# Altium PCB Heater.PcbDoc
Units mil, origin at the board's own origin, x right, y up, seen from the top; angles counter-clockwise.
Board outline 5118.11 x 2165.35 mil, 2 copper layers (Top Layer, Bottom Layer); 91 components, 63 nets, 311 pads, 49 vias.
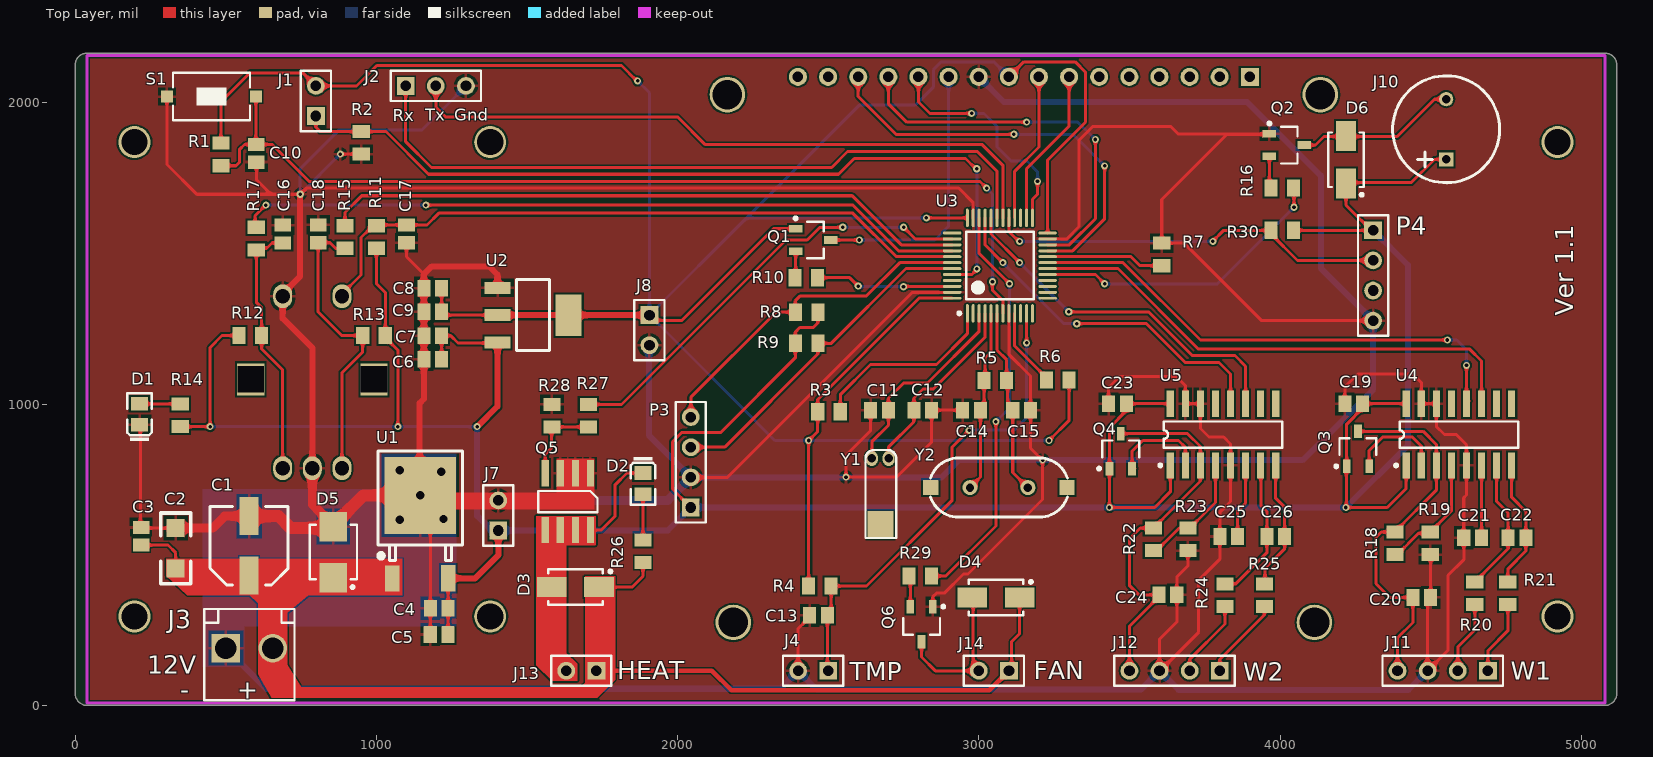
[diagram p0: Top Layer view]
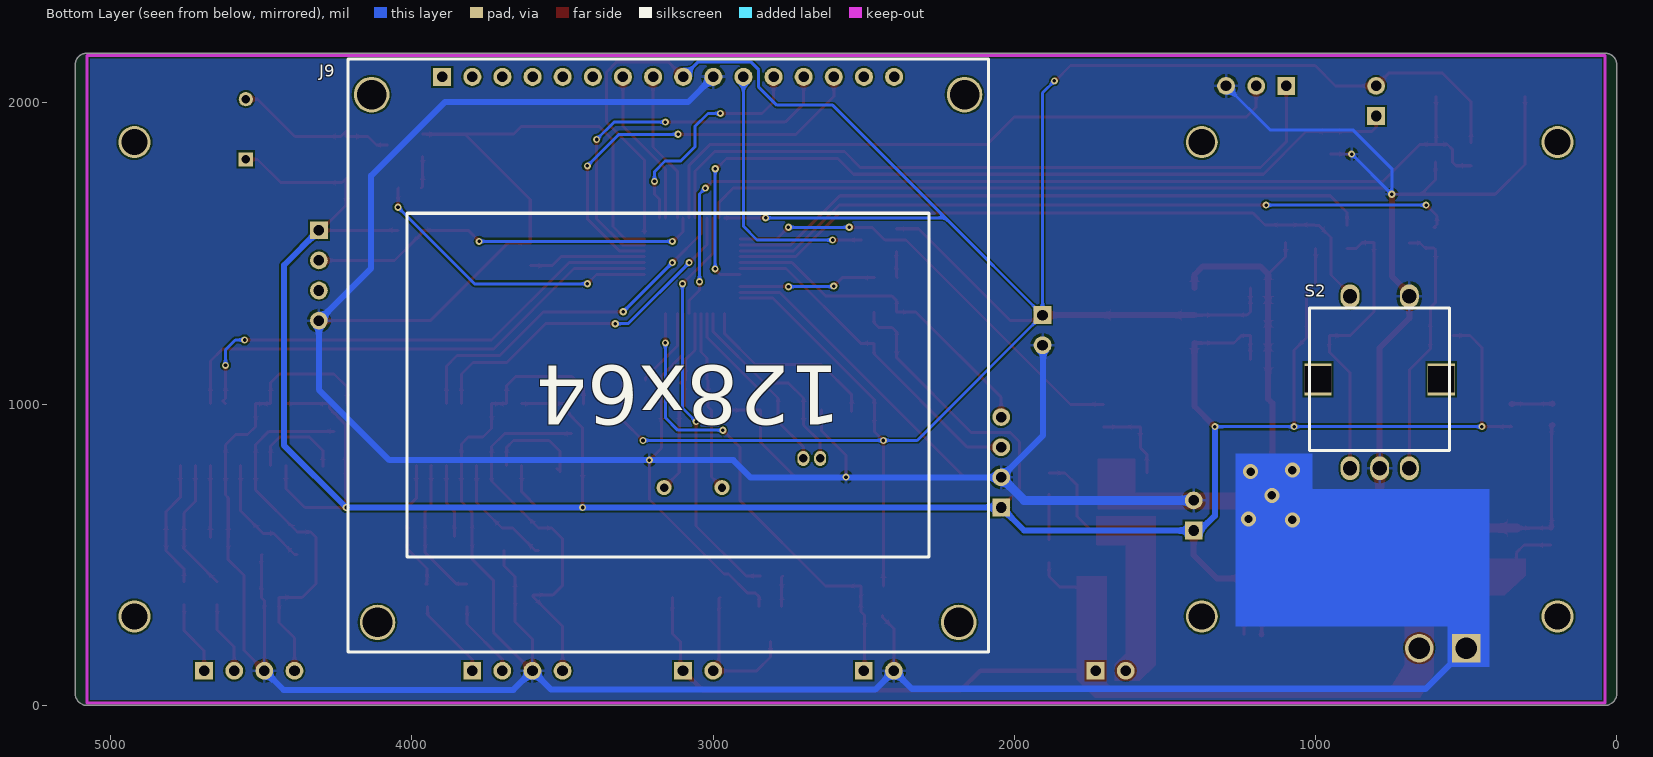
[diagram p1: Bottom Layer view, seen from below]

## Layer stack, top to bottom
Top Solder: solder mask 0.4, Solder Resist, Dk 3.5
Top Layer: signal copper 1.4
Dielectric 1: dielectric 12.6, FR-4, Dk 4.8
Bottom Layer: signal copper 1.4
Bottom Solder: solder mask 0.4, Solder Resist, Dk 3.5

## Board outline
5118.11,39.37 5118.11,2125.98 ccw(c5078.74,2125.98) 5078.74,2165.35 39.37,2165.35 ccw(c39.37,2125.98) 0,2125.98 0,39.37 ccw(c39.37,39.37) 39.37,0 5078.74,0 ccw(c5078.74,39.37)
cut-out: 7323.11,-1321.57

## Design rules (kind name [scope] priority, off if disabled: settings)
Clearance [All] p1: gap=6 ignorepadtopadclearanceinfootprint=FALSE
HoleSize [All] p1: absolutevalues=TRUE maxlimit=248.03 minlimit=11.81 maxpercent=80.000 minpercent=20.000
MinimumSolderMaskSliver [All] p1: minsoldermaskwidth=5
PolygonConnect [All] p1: connectstyle=Relief reliefconductorwidth=10 reliefentries=4 polygonreliefangle="90 Angle" airgapwidth=10
RoutingVias [All] p1: holewidth=28 width=50 viastyle="Through Hole" minholewidth=11.81 minwidth=23.62 maxholewidth=248.03 maxwidth=248.03
SilkToSilkClearance [All] p1: silktosilkclearance=0
SilkToSolderMaskClearance [IsPad] p1: minsilkscreentomaskgap=1 clearancetoexposedcopper=TRUE
SolderMaskExpansion [All] p1: expansion=4
Width [All] p1: maxlimit=100 minlimit=5 preferedwidth=10
26 further rules are at their usual default settings.

## Classes and differential pairs
component class 3Dheater3: D2 D3 D4 J13 J14 Q5 Q6 R26 R27 R28 R29
component class 3Dheater2: C19 C20 C21 C22 C23 C24 C25 C26 J11 J12 Q3 Q4 R18 R19 R20 R21 R22 R23 R24 R25 U4 U5
component class 3Dheater1: C1 C2 C3 C4 C5 C6 C7 C8 C9 C10 C11 C12 C13 C14 C15 C16 C17 C18 D1 D5 D6 J1 J2 J3 J4 J7 J8 J9 J10 P3 P4 Q1 Q2 R1 R2 R3 R4 R5 R6 R7 R8 R9 R10 R11 R12 R13 R14 R15 R16 R17 R30 S1 S2 U1 U2 U3 Y1 Y2

## Components (designator, comment, footprint, x,y, rotation, side; value= is the part's Value field where it differs from the comment)
C1 "100uF/35V" "ELCO Case D" 577.3,529.91 r270 top
C2 "47uF" 1206 334.02,588.84 r270 top
C3 "0.1uF" C0805 219.16,561.74 r270 top
C4 "47uF" C0805 1208.47,322.68 r0 top
C5 "0.1uF" C0805 1208.44,235.41 r0 top
C6 "10uF" C0805 1187.1,1148.88 r0 top
C7 "0.1uF" C0805 1187.1,1227.58 r0 top
C8 "10uF" C0805 1187.1,1384.97 r0 top
C9 "0.1uF" C0805 1187.1,1306.27 r0 top
C10 "0.1uF" C0805 601.45,1832.68 r90 top
C11 "15pF" C0805 2670.47,980 r180 top
C12 "15pF" C0805 2814.11,980.11 r0 top
C13 "0.1uF" C0805 2467.8,299.05 r0 top
C14 "22pF" C0805 2976.05,979.85 r180 top
C15 "22pF" C0805 3142.16,979.85 r0 top
C16 "0.1uF" C0805 689.8,1564.7 r270 top
C17 "0.1uF" C0805 1100,1565.47 r90 top
C18 "0.1uF" C0805 806.93,1565.47 r270 top
C19 "1uF" C0805 4244.4,1001.17 r180 top
C20 "1uF" C0805 4470.62,358.26 r180 top
C21 "1uF" C0805 4639.41,556.66 r180 top
C22 "0.1uF" C0805 4786.57,556.66 r180 top
C23 "1uF" C0805 3460.07,1001.17 r180 top
C24 "1uF" C0805 3627.59,366.93 r180 top
C25 "1uF" C0805 3829.69,560.75 r180 top
C26 "0.1uF" C0805 3985.91,560.75 r180 top
D1 "翠绿 0805" 0805_LED_S1 213.7,966.58 r90 top
D2 "红灯 0805" 0805_LED_S1 1885.07,736.34 r270 top
D3 "S1G" "DO214AC (SMA)" 1660.55,392.63 r0 top
D4 "S1G" "DO214AC (SMA)" 3056.73,358.11 r0 top
D5 "TVS" "DO214AA (SMB)" 857.13,508.77 r270 top
D6 "S1G" "DO214AC (SMA)" 4218.92,1811.52 r270 top
J1 "BOOT" HDR1X2 799.24,1956.6 r90 top
J2 "Debug" HDR1X3 1097.35,2056.6 r0 top
J3 "DC12V" HDR1X2_396 500,190 r0 top locked
J4 "TEMP" HDR1X2 2500,115 r180 top
J7 "Header 2" HDR1X2 1404.91,580.57 r90 top
J8 "Header 2" HDR1X2 1906.57,1295.73 r270 top
J9 "LCD" LCD12864 3149.61,1062.99 r0 bottom locked
J10 "BEEP" BELL-5 4551.41,1812.63 r90 top
J11 "Sensor" HDR1X4 4690,115 r180 top locked
J12 "Sensor" HDR1X4 3800,115 r180 top locked
J13 "HEATER" HDR1X2 1730.32,115 r180 top locked
J14 "FAN" HDR1X2 3100,115 r180 top
P3 "Header 4" HDR1X4 2043.98,657.09 r90 top
P4 "Header 4" HDR1X4 4308.87,1577.34 r270 top
Q1 "S8550" SOT-23-3L 2450,1545 r180 top
Q2 "S8050" SOT-23-3L 4022.67,1860.2 r180 top
Q3 "S8550" SOT-23-3L 4258.53,851.62 r270 top
Q4 "S8550" SOT-23-3L 3471.12,844.09 r270 top
Q5 "IRF8736PBF" "SOIC127P600X175-8N (SO8)" 1635.55,676.29 r270 top
Q6 "S8050" SOT-23-3L 2809.94,269.98 r90 top
R1 "10K" R0805 483.81,1828.96 r90 top
R2 "10K" R0805 950,1867.6 r270 top
R3 "0R" R0805 2502.6,975 r0 top
R4 "100K" R0805 2472.54,396.31 r0 top
R5 "1M" R0805 3054.91,1078.75 r180 top
R6 "0R" R0805 3262.6,1080 r180 top
R7 "10K" R0805 3607.11,1497.02 r90 top
R8 "10K" R0805 2428.31,1305.47 r180 top
R9 "10K" R0805 2428.31,1202.22 r0 top
R10 "2K" R0805 2427.4,1420 r180 top
R11 "10K" R0805 1000,1555 r270 top
R12 "10K" R0805 581.76,1227.97 r180 top
R13 "10K" R0805 992.13,1227.97 r0 top
R14 "560R" R0805 349.1,963.77 r270 top
R15 "10K" R0805 895.84,1555 r270 top
R16 "2K" R0805 4006.92,1717.49 r0 top
R17 "10K" R0805 601.45,1549.94 r270 top
R18 "20K" R0805 4381.18,538.28 r90 top
R19 "8.2K" R0805 4498.53,538.28 r270 top
R20 "1K" R0805 4646.51,371.96 r270 top
R21 "1K" R0805 4756.06,371.96 r270 top
R22 "20K" R0805 3579.55,551.47 r90 top
R23 "8.2K" R0805 3693.95,551.47 r270 top
R24 "1K" R0805 3817.1,366.35 r270 top
R25 "1K" R0805 3948.31,366.35 r270 top
R26 "1K" R0805 1885.07,512.28 r270 top
R27 "100R" R0805 1703.81,961.79 r270 top
R28 "100K" R0805 1582.98,961.79 r90 top
R29 "1.5K" R0805 2806.24,429.64 r0 top
R30 "1K" R0805 4006.92,1577.34 r180 top
S1 "SW-PB" SW-PB2 452.35,2021.44 r180 top
S2 "EC11" EC11 787.4,1082.68 r180 bottom locked
U1 "LM7805CT" TO-252-2-180 1145.41,421.92 r90 top
U2 "AMS1117-3.3V" SOT-223 1520.33,1295.73 r180 top
U3 "STM32F103C" LQFP48_L 3070,1460 r90 top locked
U4 "HX711" SOP16M 4593.94,899.12 r0 top locked
U5 "HX711" SOP16M 3810.65,899.12 r0 top locked
Y1 "32.768K" XTAL32 2700.72,819.88 r270 top
Y2 "8M" XTAL_US 3162.86,723.2 r180 top

## Footprints (in the part's own frame and the unit in brackets; to place one, negate y for a bottom-side part, rotate by r counter-clockwise, add the part's x,y. Pads: shape width x height; smd on the part's side, far side on the other; paste and mask are expansions set on the pad)
0805_LED_S1 [mm]
  rect 1.16x1.47 smd: A(0.89,0) K(-0.89,0)
  silkscreen extent -2.24,-1.04 1.77,1.03, body extent -1.01,-0.62 1.01,0.62, height 1.1
1206 [mil]
  rect 60x60 smd: 1(-0.03,-0.3) 2(134.97,-0.3)
  silkscreen extent -50,-50 185,50
BELL-5 [mm]
  rect 1.2x1.2 hole 0.7: 1(0,0)
  round 1.2 hole 0.7: 2(5.08,0)
  silkscreen extent -1.97,-4.51 7.05,4.51
C0805 [mm] "Chip Capacitor, Body 2.0x1.3mm, IPC High Density"
  rect 1.1x1.4 smd: 1(-0.75,0) 2(0.75,0)
  body extent -1.1,-0.72 1.1,0.72, height 1.4
"DO214AA (SMB)" [mm]
  rect 2.5x2.3 smd: 1(-2.15,0) 2(2.15,0)
  silkscreen extent -2.3,-2 3.07,2, body extent -2.79,-1.97 2.79,1.97, height 2.61
"DO214AC (SMA)" [mm]
  rect 2.5x1.7 smd: 1(-2,0) 2(2,0)
  silkscreen extent -2.3,-1.5 3.08,1.5, body extent -2.74,-1.4 2.74,1.4, height 2.3
EC11 [mm] "旋转编码开关"
  oval 1.6x2 hole 1.2: 1(-2.5,7) 2(2.5,7) 3(-2.5,-7.5) 4(2.5,-7.5) 5(0,-7.5)
  rect 2.3x2.7 hole 2.2 square: ""(-5.2,0) ""(5.2,0)
  silkscreen extent -5.9,-6 5.9,6, body extent -9.65,-5.97 5.97,5.97, height 6.5
"ELCO Case D" [mm]
  rect 3.2x1.6 smd: 1(2.5,0) 2(-2.5,0)
  silkscreen extent -3.3,-3.3 3.3,3.3, body extent -3.5,-3.3 3.5,3.3, height 5.41
HDR1X2 [mm] "Connector; Header; 2 Position"
  rect 1.5x1.5 hole 0.9: 1(0,0)
  round 1.5 hole 0.9: 2(2.54,0)
  silkscreen extent -1.27,-1.27 3.81,1.27
HDR1X2_396 [mm] "Connector; Header; 2 Position"
  rect 2.4x2.4 hole 1.8: 1(0,0)
  round 2.4 hole 1.8: 2(3.96,0)
  silkscreen extent -1.8,-4.4 5.8,3.3
HDR1X3 [mm] "Connector; Header; 3 Position"
  rect 1.5x1.5 hole 0.9: 1(0,0)
  round 1.5 hole 0.9: 2(2.54,0) 3(5.08,0)
  silkscreen extent -1.27,-1.27 6.35,1.27
HDR1X4 [mm] "Connector; Header; 4 Position"
  rect 1.5x1.5 hole 0.9: 1(0,0)
  round 1.5 hole 0.9: 2(2.54,0) 3(5.08,0) 4(7.62,0)
  silkscreen extent -1.27,-1.27 8.89,1.27
LCD12864 [mil]
  rect 60x60 hole 35: 1(750,-1023.62)
  round 60 hole 35: 2(650,-1023.62) 3(550,-1023.62) 4(450,-1023.62) 5(350,-1023.62) 6(250,-1023.62) 7(150,-1023.62) 8(50,-1023.62) 9(-50,-1023.62) 10(-150,-1023.62) 11(-250,-1023.62) 12(-350,-1023.62) 13(-450,-1023.62) 14(-550,-1023.62) 15(-650,-1023.62) 16(-750,-1023.62)
  round 118.11 hole 98.43: ""(-984.25,-964.57) ""(-964.57,787.4) ""(964.57,787.4) ""(984.25,-964.57)
  silkscreen extent -1063,-1083 1063,886
LQFP48_L [mm] "Thin QFP, 48-Leads, Body 7x7mm, Pitch 0.5mm, IPC High Density"
  oval 1.55x0.25 smd: 1(-4.025,2.75) 2(-4.025,2.25) 3(-4.025,1.75) 4(-4.025,1.25) 5(-4.025,0.75) 6(-4.025,0.25) 7(-4.025,-0.25) 8(-4.025,-0.75) 9(-4.025,-1.25) 10(-4.025,-1.75) 11(-4.025,-2.25) 12(-4.025,-2.75) 25(4.025,-2.75) 26(4.025,-2.25) 27(4.025,-1.75) 28(4.025,-1.25) 29(4.025,-0.75) 30(4.025,-0.25) 31(4.025,0.25) 32(4.025,0.75) 33(4.025,1.25) 34(4.025,1.75) 35(4.025,2.25) 36(4.025,2.75)
  oval 0.25x1.55 smd: 13(-2.75,-4.025) 14(-2.25,-4.025) 15(-1.75,-4.025) 16(-1.25,-4.025) 17(-0.75,-4.025) 18(-0.25,-4.025) 19(0.25,-4.025) 20(0.75,-4.025) 21(1.25,-4.025) 22(1.75,-4.025) 23(2.25,-4.025) 24(2.75,-4.025) 37(2.75,4.025) 38(2.25,4.025) 39(1.75,4.025) 40(1.25,4.025) 41(0.75,4.025) 42(0.25,4.025) 43(-0.25,4.025) 44(-0.75,4.025) 45(-1.25,4.025) 46(-1.75,4.025) 47(-2.25,4.025) 48(-2.75,4.025)
  silkscreen extent -4.15,-2.85 2.85,3.55, body extent -3.5,-3.5 3.5,3.5, height 1.6
R0805 [mm]
  rect 1.1x1.45 smd mask+0.203: 1(-0.95,0) 2(0.95,0)
  body extent -1,-0.6 1,0.65, height 0.44
"SOIC127P600X175-8N (SO8)" [mm]
  rect 2.2x0.6 smd: 1(-2.4,1.905) 2(-2.4,0.635) 3(-2.4,-0.635) 4(-2.4,-1.905) 5(2.4,-1.905) 6(2.4,-0.635) 7(2.4,0.635) 8(2.4,1.905)
  silkscreen extent -0.9,-2.5 0.9,2.5, body extent -3,-2.45 3,2.45, height 1.75
SOP16M [mm]
  rect 0.6x2.2 smd: 1(-4.445,-2.6) 2(-3.175,-2.6) 3(-1.905,-2.6) 4(-0.635,-2.6) 5(0.635,-2.6) 6(1.905,-2.6) 7(3.175,-2.6) 8(4.445,-2.6) 9(4.445,2.6) 10(3.175,2.6) 11(1.905,2.6) 12(0.635,2.6) 13(-0.635,2.6) 14(-1.905,2.6) 15(-3.175,2.6) 16(-4.445,2.6)
  silkscreen extent -5.42,-2.72 5,1.1
SOT-23-3L [mm] "http://www.aosmd.com/res/packaging_information/SOT-23-3L.pdf"
  rect 1.15x0.65 smd: 1(1.475,-0.95) 2(1.475,0.95) 3(-1.475,0)
  silkscreen extent -0.9,-1.95 1.6,1.55, body extent -0.9,-1.55 0.9,1.55, height 1.25
SOT-223 [mm]
  rect 2.2x1 smd: 1(3,-2.3) 2(3,0) 3(3,2.3)
  rect 2.2x3.5 smd: 2(-3,0)
  silkscreen extent -1.4,-3 1.4,3, body extent -3.49,-3.24 3.49,3.24, height 1.64
SW-PB2 [mm]
  rect 1x1 smd: 1(-3.753,0.001) 2(3.747,0.001)
  silkscreen extent -3.25,-2 3.25,2
TO-252-2-180 [mm] "180度编带包装"
  rect 2.2x1.2 smd: 1(0,2.361) 3(0.004,-2.361)
  rect 6.5x6 smd: 2(7,0)
  silkscreen extent 1.5,-3.57 10.75,3.57, body extent -0.2,-3.27 9.74,3.27, height 2.44
XTAL32 [mil]
  oval 50x40 hole 28: 1(0,0) 2(0,-56)
  rect 92.13x86 smd: ""(220,-27)
  silkscreen extent -28,-77 264,25
XTAL_US [mil]
  round 50 hole 28: 1(0,0) 2(192.13,0)
  rect 50x50 smd: ""(-130.32,0) ""(322.44,0)
  silkscreen extent -131,-98 323,98

## Part data
C1: "RO ELCO 100uF 20% 35V CASE-D EEEFP PAN", Faber ItemCode=36865800, ID=Library_CAP-0004
C2 C3 C4 C5 C6 C7 C8 C9 C10 C11 C12 C13 C14 C15 C16 C17 C18 C19 C20 C21 C22 C23 C24 C25 C26: library part CAP, "Capacitor"
D1: library part "0805 翠绿", "发光二极管", Package=0805, SuppliersPartNumber=C2297, ComponentLink1Description=供应商链接, ComponentLink1URL=http://www.szlcsc.com/product/details_2670.html, Supplier=LC
D2: library part "0805 红灯", "发光二极管", Package=0805, SuppliersPartNumber=C2295, ComponentLink1Description=供应商链接, ComponentLink1URL=http://www.szlcsc.com/product/details_2668.html, Supplier=LC
D3 D4 D6: library part Library_DIO-0001, "RO DIODE S1G DO-214AC", Faber ItemCode=32284000, ID=Library_DIO-0001, Info="Fast Rectifiers 1A 400V"
D5: "TVS保护", PackageDocument=Sep-1996, Code_JEDEC=DO-214-AB, LatestRevisionDate=17-Jul-2002, LatestRevisionNote="Re-released for DXP Platform.", PackageReference=SMC, Published=8-Jun-2000, Publisher="Altium Limited", Type=SMBJ12CA
J1 J4 J13 J14: library part "Header 2H", "Header, 2-Pin, Right Angle", LatestRevisionDate=17-Jul-2002, LatestRevisionNote="Re-released for DXP Platform.", Publisher="Altium Limited"
J2: library part "Header 3", "接插件", LatestRevisionDate=17-Jul-2002, LatestRevisionNote="Re-released for DXP Platform.", Publisher="Altium Limited"
J3: library part "Header 2", "接插件", LatestRevisionDate=17-Jul-2002, LatestRevisionNote="Re-released for DXP Platform.", Publisher="Altium Limited"
J7 J8: "接插件", LatestRevisionDate=17-Jul-2002, LatestRevisionNote="Re-released for DXP Platform.", Publisher="Altium Limited"
J9: library part "Header 16", "Header, 16-Pin", LatestRevisionDate=17-Jul-2002, LatestRevisionNote="Re-released for DXP Platform.", Publisher="Altium Limited"
J10: "蜂鸣器"
J11 J12: library part "Header 4", "Header, 4-Pin", LatestRevisionDate=17-Jul-2002, LatestRevisionNote="Re-released for DXP Platform.", Publisher="Altium Limited"
P3 P4: "Header, 4-Pin", LatestRevisionDate=17-Jul-2002, LatestRevisionNote="Re-released for DXP Platform.", Publisher="Altium Limited"
Q1 Q3 Q4: "PNP三极管", PackageDocument=Sep-1998, Code_JEDEC=TO-92A, ComponentLink1Description="Manufacturer Link", ComponentLink1URL=http://www.fairchildsemi.com/, ComponentLink2Description=Datasheet, ComponentLink2URL=http://www.fairchildsemi.com/ds/2N%2F2N3906.pdf, DatasheetDocument=1997, LatestRevisionDate=15-Jan-2003, LatestRevisionNote="PCB Footprint 'BCY-W3/D4.7' replaced", PackageReference=TO-92A, Published=8-Jun-2000, Publisher="Altium Limited"
Q2 Q6: "NPN三极管", PackageDocument=Sep-1998, Code_JEDEC=TO-92A, ComponentLink1Description="Manufacturer Link", ComponentLink1URL=http://www.fairchildsemi.com/, ComponentLink2Description=Datasheet, ComponentLink2URL=http://www.fairchildsemi.com/ds/2N%2F2N3904.pdf, DatasheetDocument=1997, LatestRevisionDate=15-Jan-2003, LatestRevisionNote="PCB Footprint 'BCY-W3/D4.7' replaced", PackageReference=TO-92A, Published=8-Jun-2000, Publisher="Altium Limited"
Q5: library part LIBRARY_FET-0002, "IRF8736PBF - MOSFET, N SO-8", Faber ItemCode=36926000, ID=LIBRARY_FET-0002, Info="HEXFET Power MOSFET", Mfg="INTERNATIONAL RECTIFIER", Mfg code=IRF8736PBF
R1 R2 R3 R4 R5 R6 R7 R8 R9 R10 R11 R12 R13 R14 R15 R16 R17 R18 R19 R20 R21 R22 R23 R24 R25 R26 R27 R28 R29 R30: library part Res1, "贴片电阻", LatestRevisionDate=17-Jul-2002, LatestRevisionNote="Re-released for DXP Platform.", PackageReference=AXIAL-0.4, Published=8-Jun-2000, Publisher="Altium Limited"
S1: "微动开关", LatestRevisionDate=17-Jul-2002, LatestRevisionNote="Re-released for DXP Platform.", PackageReference=SPST-2, Published=24-Mar-1999, Publisher="Altium Limited"
S2: "旋转编码器"
U2: library part LM1117
U3: "STM32单片机48引脚"
U4 U5: "AD转换"
Y1 Y2: library part CRYSTAL, "Crystal"

## Free pads (board coordinates)
  round 106.3 hole 86.61: ""(196.85,295.28) ""(196.85,1870.08) ""(1377.95,295.28) ""(1377.95,1870.08) ""(4921.26,295.28) ""(4921.26,1870.08)

## Via types
v1: diameter 23.62, hole 11.81, Top Layer to Bottom Layer, 44 vias
v2: diameter 50, hole 28, Top Layer to Bottom Layer, 5 vias

## Nets (pads, with @x,y where several pads share a name; then routed paths per layer and width w, separated by ;. In a path a pad name is that pad's centre, name@x,y a point inside that pad or via, vN(x,y) a via of type N, cw(c..) or ccw(c..) an arc to the next point about the centre after c; other vN are vias at no path point)
3V3: C8.2 C9.2 J1.2 J8.1 J9.9 Q1.1 R1.2 R3.1 R4.1 R6.1 U2.2 U3.24 U3.36 U3.48 | length 9961.7
  Top Layer w10: R1.2 483.81,2003.53 580.41,2100.14 755.7,2100.14 J1.2 934.11,2056.6 1001.7,2124.2 1813.45,2124.2 1864.64,2073.01 v1(1867.16,2073.01) ; C8.2 C9.2 1227.17,1295.73 U2.2@1402.22,1295.73 ; J8.1@1904.46,1293.61 J8.1 ; J8.1@1904.75,1278.56 2014.86,1278.56 2318.7,1582.4 Q1.1 ; R4.1 v1(2435.14,879.52) 2465.2,909.58 R3.1 2465.2,1015.26 2801.67,1351.73 U3.48 ; v1(2825.93,1618.46) U3.36 ; J9.9 3149.46,2136.47 3320.04,2136.47 3354.16,2102.34 3354.16,1936.01 3228.46,1810.31 U3.24 ; v1(3233.07,879.52) 3300,946.46 R6.1
  Top Layer w20: U2.2@1402.22,1295.73 1593.16,1295.73 J8.1
  Bottom Layer w10: J1.2@796.63,2059.22 J1.2 ; v1(1867.16,2073.01) 1906.57,2033.6 J8.1 ; v1(2825.93,1618.46) 2229.31,1618.46 ; J9.9 3049.75,2136.47 2875.32,2136.47 2848.78,2109.93 2848.78,2052.58 2788.68,1992.47 2603.32,1992.47 2229.31,1618.46 ; v1(3233.07,879.52) v1(2435.14,879.52) 2322.78,879.52 J8.1 ; J8.1 2229.31,1618.46
5V: C4.2 C5.2 C6.2 C7.2 C19.1 C23.1 D6.2 J7.1 J10.1 P3.1 P4.1 Q3.1 Q4.1 R8.1 R9.1 R11.2 R12.2 R13.2 R14.2 R30.1 U1.3 U2.3 U4.1 U4.16 U5.1 U5.16 | length 10773.3
  Top Layer w10: R14.2 350.67,924.8 353.55,927.68 356.84,924.39 357.82,925.38 v1(448.09,925.38) 448.09,1188.32 487.74,1227.97 R12.2 ; R11.2 1000,1400.48 1029.53,1370.95 R13.2 1029.53,1221.08 1071.46,1179.15 v1(1071.46,925.38) ; C6.2 C7.2 1246.6,1227.58 1271.09,1203.09 1402.22,1203.09 U2.3 ; C5.2 1237.96,322.65 C4.2 1238,421.72 U1.3 ; P3.1 1982.92,718.15 1982.92,874.93 2014.74,906.75 2143.81,906.75 2390.91,1153.85 R9.1 2390.91,1239.21 2405.92,1254.22 2450.36,1254.22 2465.72,1269.57 R8.1 ; U5.1 3635.65,709.07 3583.67,657.09 v1(3433.72,657.09) Q4.1 3433.72,922.01 3489.6,977.88 C23.1 3489.91,1001.48 U5.16 ; R30.1@4046.29,1577.34 P4.1@4302.31,1577.34 ; P4.1 P4.1@4302.31,1577.34 ; U4.1 4418.94,720.27 4355.76,657.09 v1(4218.63,657.09) 4219.88,658.34 4219.88,792.3 Q3.1 4221.13,933.82 4273.93,986.61 C19.1 4274.24,1001.48 U4.16 ; J10.1 4512.79,1812.63 4435.89,1735.72 4231.73,1735.72 4218.92,1748.53 D6.2 4218.92,1660.72 P4.1@4302.31,1577.34
  Top Layer w20: U1.3 1327.84,422.09 1404.91,499.16 J7.1 ; v1(1334.67,925.38) 1402.22,992.92 U2.3@1402.22,1203.09
  Bottom Layer w10: v1(448.09,925.38) v1(1071.46,925.38) v1(1334.67,925.38)
  Bottom Layer w20: v1(1334.67,925.38) 1334.67,629.49 1383.6,580.57 J7.1 1967.46,580.57 P3.1 v1(3433.72,657.09) v1(4218.63,657.09) 4424.08,862.53 4424.08,1462.13 P4.1
12V: C1.1 C2.2 C3.2 D3.2 D4.2 D5.2 J3.2 J13.1 J14.1 R26.2 U1.1 | length 2066.2
  Top Layer w10: C3.2@219.27,532.32 C3.2 308.27,532.21 333.72,506.76 C2.2 ; D3.2 1848.77,392.63 1885.07,428.93 R26.2 ; J14.1 3108.97,123.97 3108.97,211.91 3135.47,238.41 D4.2
  Top Layer w15: J13.1 2113.84,115 2178.75,50.09 3035.09,50.09 J14.1
BEEP: R16.2 U3.17 | length 1000.4
  Top Layer w10: U3.17 3387.05,1430.47 v1(3417.86,1399.67) ; R16.2 4046.29,1715.52 v1(4046.29,1653.64)
  Bottom Layer w10: v1(3417.86,1399.67) 3792.32,1399.67 v1(4046.29,1653.64)
BOOT0: J1.1 R2.1 U3.44 | length 2755.5
  Top Layer w10: J1.1 799.24,1919.06 813.3,1905 R2.1 1031.66,1905 1173.33,1763.33 2534.34,1763.33 2586.68,1815.68 2955.82,1815.68 2990.05,1781.45 v1(2993.12,1781.45) ; U3.44 2977.48,1430.47 2993.53,1446.52 v1(2993.53,1448.89)
  Bottom Layer w10: v1(2993.12,1781.45) 2993.32,1781.25 2993.32,1449.09 v1(2993.53,1448.89)
EC_A: R15.1 U3.39 | length 2150.3
  Top Layer w10: R15.1 895.84,1636.49 951.29,1691.94 2579.55,1691.94 2742.59,1528.9 U3.39
EC_B: R17.1 U3.40 | length 2444.9
  Top Layer w10: R17.1 606.22,1587.34 597.35,1596.21 597.35,1625.48 v1(632.95,1661.07) ; v1@1159.79,1656.5 v1(1164.37,1661.07) 2581.61,1661.07 2733.46,1509.21 U3.40
  Bottom Layer w10: v1(632.95,1661.07) v1(1164.37,1661.07)
EC_K: C17.2 R11.1 S2.1 U3.41 | length 2277.2
  Top Layer w10: S2.1 885.83,1366.14 948.82,1429.13 948.82,1553.24 987.98,1592.4 R11.1 1002.6,1595 C17.2 1167.95,1595 1207.14,1634.18 2581.91,1634.18 2726.57,1489.53 U3.41
FAN: D4.1 J14.2 Q6.3 | length 512.4
  Top Layer w10: Q6.3 Q6.3@2809.94,202.07 ; D4.1 2981.42,354.68 2981.42,133.58 J14.2 2855.77,115 2809.91,160.86 Q6.3@2809.91,202.03 ; Q6.3@2809.91,202.03 Q6.3@2809.94,202.07
Fan_Ctl: R29.2 U3.34 | length 1365
  Top Layer w10: R29.2 2890.47,429.64 3056.73,595.9 v1(3056.73,942.25) ; U3.34 3001.1,1500.48 v1(3101.91,1399.67)
  Bottom Layer w10: v1(3056.73,942.25) 3101.91,987.44 v1(3101.91,1399.67)
GND: C1.2 C2.1 C3.1 C4.1 C5.1 C6.1 C7.1 C8.1 C9.1 C10.1 C11.2 C12.2 C13.1 C14.2 C15.2 C16.1 C17.1 C18.1 C19.2 C20.1 C21.2 C23.2 C24.1 C25.2 D1.K D5.1 J2.3 J3.1 J4.2 J7.2 J8.2 J9.10 J11.3 J12.3 P3.2 P4.4 Q2.1 Q5.1 Q5.2 Q5.3 Q6.1 R2.2 R7.2 R19.2 R23.2 R28.2 S1.2 S2.2 S2.5 U1.2 U2.1 U3.8 U3.23 U3.35 U3.47 U4.5 U4.14 U4.15 U5.5 U5.14 U5.15 | length 27708.5
  Top Layer w10: C3.1@216.43,594 D1.K@216.43,928.81 ; C3.1 221.55,588.87 C2.1 ; S1.2 304.82,1796.07 403.94,1696.95 650.04,1696.95 ; C10.1 602.13,1802.47 602.13,1744.86 650.04,1696.95 ; v1(880.5,1830.2) R2.2 ; C17.1 1100,1489.7 1157.57,1432.13 ; v2(1145.41,697.51) 1178.91,664.01 C4.1 ; C5.1 C4.1 ; P3.2 2165.65,757.09 2779.98,1371.42 U3.47 ; J4.2 2400,254.88 2438.27,293.15 C13.1 ; C11.2 2640.94,912.54 2559.06,830.65 v1(2559.06,758.04) 2727.42,758.04 2843.64,874.26 C12.2 2946.27,980.11 C14.2 ; Q6.1 2847.34,360.43 2859.6,372.69 2885.45,372.69 2949,436.24 2964.28,436.24 3211.55,683.51 v1(3211.55,814.1) 3171.69,853.97 C15.2 3171.69,1093.63 3099.53,1165.79 U3.8 ; U3.35 2981.42,1669.02 2932.95,1717.49 767.79,1717.49 v1(747.25,1696.95) 650.04,1696.95 ; U3.23 3228.54,1548.66 3291.51,1548.66 3332.48,1589.63 3332.48,1876.62 3377.08,1921.22 3637.86,1921.22 3661.48,1897.6 Q2.1@3954.76,1897.6 ; C23.2 3430.54,1054.34 3468.08,1091.87 3655.83,1091.87 3685.65,1062.04 U5.15 U5.14 3735.65,919.42 3764.03,891.04 3812.72,891.04 3835.65,868.11 U5.5 3835.65,676.65 3800.16,641.16 C25.2 3800.16,485.36 3729.96,415.16 3729.96,243.08 3601.88,115 J12.3 3600,219.86 3657.12,276.97 C24.1 3657.12,426.34 3693.95,463.17 R23.2 ; R7.2 R7.2@3607.28,1534.42 ; Q2.1 Q2.1@3954.76,1897.6 ; C19.2 4214.87,1056.69 4258.52,1100.34 4440.4,1100.34 4468.94,1071.81 U4.15 U4.14 4518.94,925.98 4545.81,899.12 4585,899.12 4618.94,865.18 U4.5 4618.94,698.42 4609.84,689.31 4609.84,556.7 C21.2 4609.88,483.99 4557.84,431.94 4557.84,182.84 J11.3 4490,348.11 C20.1 4500.15,498.27 4499.52,498.9 4499.52,499.89 R19.2 ; P4.4 3939.23,1277.34 3682.14,1534.42 R7.2@3607.28,1534.42 ; C4.1 C4.1 ; R7.2@3607.28,1534.42 3607.28,1679.31 3822.92,1894.96 3952.11,1894.96 Q2.1@3954.76,1897.6
  Top Layer w20: D1.K D1.K@216.43,928.81 ; C3.1@216.43,594 C3.1 ; v1(747.25,1696.95) 747.14,1696.84 747.14,1424.31 688.98,1366.14 S2.2 688.98,1285.14 787.4,1186.71 S2.5 ; v2(1145.41,697.51) 1143.79,699.13 1143.79,1003.29 1157.57,1017.07 C6.1 C7.1 C9.1 C8.1 1157.57,1431.06 1184.01,1457.49 1374.99,1457.49 1402.22,1430.27 U2.1
  Top Layer w30: C2.1 456.47,588.87 495.93,628.34 C1.2 ; S2.5 787.4,667.08 D5.1@852.88,601.61 ; D5.1@852.88,589.16 D5.1 D5.1@857.13,597.35
  Top Layer w40: C1.2 675.73,628.34 714.9,589.16 852.88,589.16 D5.1@852.88,601.61 ; D5.1@857.13,597.35 957.29,697.51 v2(1145.41,697.51)
  Bottom Layer w10: v1(880.5,1830.2) v1(747.25,1696.95) 747.25,1781.78 876.37,1910.91 1151.66,1910.91 J2.3
  Bottom Layer w20: J3.1 634.7,55.3 2340.3,55.3 J4.2 2462.44,52.56 3537.56,52.56 J12.3 3663.52,51.48 4426.48,51.48 J11.3 ; J8.2@1904.75,1195.73 1904.75,896.31 P3.2 2876.48,757.09 2933.35,813.95 4074.7,813.95 4308.87,1048.12 P4.4 4135.17,1451.04 4135.17,1758.47 3891.05,2002.59 3083.63,2002.59 J9.10
  Bottom Layer w30: J7.2 1967.46,680.57 P3.2
  other v2: 1076.95,615.71 1222.94,618.77 1216.03,776.1 1076.95,781.13
HEATER: D2.K D3.1 J13.2 Q5.5 Q5.6 Q5.7 Q5.8 | length 313.9
  Top Layer w10: Q5.8 1745.98,581.8 1792.98,628.8 1792.98,732.61 1831.75,771.38 D2.K
Heater_Ctl: R27.1 U3.38 | length 1474.4
  Top Layer w10: R27.1 1813.86,999.2 2359.67,1545 2430.16,1545 2472.5,1587.34 v1(2548.12,1587.34) ; v1(2750.31,1587.34) 2789.07,1548.58 U3.38
  Bottom Layer w10: v1(2548.12,1587.34) 2745.37,1587.34 v1(2750.31,1587.34) v1@2745.37,1582.4
HUM_DATA: P4.2 R30.2 U3.29 | length 1332.3
  Top Layer w10: U3.29 3099.61,1618.39 3099.61,1573.48 3130.12,1542.98 3132.82,1542.98 v1(3135.47,1540.33) ; v1(3777.17,1540.67) 3777.17,1541.85 3812.66,1577.34 R30.2 3969.52,1565.69 4057.87,1477.34 P4.2
  Bottom Layer w10: v1(3135.47,1540.33) 3135.64,1540.5 3777,1540.5 v1(3777.17,1540.67)
LCD_BL: R10.1 U3.46 | length 459.7
  Top Layer w10: R10.1 2571.35,1420 v1(2599.61,1391.75) ; v1(2750,1390) 2751.18,1391.18 2911.46,1391.18 U3.46
  Bottom Layer w10: v1(2599.61,1391.75) 2601.35,1390 v1(2750,1390)
LCD_CS: J9.12 U3.25 | length 774.6
  Top Layer w10: J9.12 2799.61,2003.4 2837.72,1965.28 v1(2976.05,1965.28) ; U3.25 3178.27,1679.9 3194.88,1696.51 v1(3194.88,1739.62)
  Bottom Layer w10: v1(2976.05,1965.28) 3017.12,1965.28 3060.77,1921.63 3060.77,1853.72 3107.22,1807.27 3159.64,1807.27 3194.88,1772.04 v1(3194.88,1739.62)
LCD_DC: J9.14 U3.21 | length 1387.6
  Top Layer w10: J9.14 2599.61,2021.61 2725.14,1896.08 v1(3116.51,1896.08) ; U3.21 3311.54,1509.21 3417.86,1615.53 v1(3417.86,1790.9)
  Bottom Layer w10: v1(3116.51,1896.08) 3312.68,1896.08 v1(3417.86,1790.9)
LCD_LED+: J9.11 Q1.3 | length 906.6
  Top Layer w10: Q1.3 v1(2603.32,1545)
  Bottom Layer w10: v1(2603.32,1545) 2854.22,1545 2899.61,1590.38 J9.11
LCD_RES: J9.13 U3.22 | length 1283.3
  Top Layer w10: J9.13 2699.61,1997.54 2760.79,1936.36 v1(3158.58,1936.36) ; U3.22 3228.54,1528.98 3300.33,1528.98 3387.05,1615.7 v1(3387.05,1878.76)
  Bottom Layer w10: v1(3158.58,1936.36) 3329.45,1936.36 v1(3387.05,1878.76)
LCD_SCK: J9.7 U3.26 | length 526.6
  Top Layer w10: U3.26 3158.58,1781.45 3299.61,1922.48 J9.7
LCD_SI: J9.8 U3.28 | length 501.4
  Top Layer w10: U3.28 3119.21,1773.19 3199.61,1853.59 J9.8
NetC11_1: C11.1 U3.3 Y1.2 | length 675.7
  Top Layer w10: Y1.2 2644.72,874.94 2700,930.22 C11.1 2700,1020.27 2750.31,1070.59 2829.57,1070.59 3001.1,1242.12 U3.3
NetC12_1: C12.1 U3.4 Y1.1 | length 634.3
  Top Layer w10: Y1.1 2700.72,858.28 2784.58,942.14 C12.1 2784.58,1020.27 2814.39,1050.09 2848.73,1050.09 3020.79,1222.14 U3.4
NetC14_1: C14.1 R5.2 U3.5 Y2.2 | length 607.2
  Top Layer w10: Y2.2 3005.58,758.04 C14.1 3017.51,991.79 R5.2 3020.79,1082.02 3020.79,1153.65 3040.47,1173.33 U3.5
NetC15_1: C15.1 R5.1 U3.6 Y2.1 | length 644.4
  Top Layer w10: U3.6 3060.16,1179.49 3092.31,1147.34 R5.1@3092.31,1087.24 ; R5.1@3108.97,1070.59 R5.1@3092.31,1087.24 ; Y2.1 3112.63,773.42 C15.1 3095.98,996.51 3095.98,1075.08 R5.1 R5.1@3092.31,1087.24
NetC16_2: C16.2 R12.1 R17.2 S2.4 | length 859.1
  Top Layer w10: S2.4 688.98,1113.15 619.17,1182.96 R12.1 619.17,1320.39 601.45,1338.1 R17.2 607.43,1518.52 636.68,1518.52 653.33,1535.18 C16.2
NetC18_2: C18.2 R13.1 R15.2 S2.3 | length 976.2
  Top Layer w10: S2.3 885.83,1104.39 954.72,1173.29 R13.1 884.68,1227.97 806.93,1305.73 C18.2 807.39,1536.41 845.36,1536.41 864.17,1517.6 R15.2
NetC20_2: C20.2 J11.4 Q3.3 R18.2 U4.3 | length 1255.8
  Top Layer w10: Q3.3 4475.14,909.69 4518.94,865.89 U4.3 4518.94,714.42 R18.2@4380.2,575.68 ; R18.2 R18.2@4380.2,575.68 ; J11.4 4390,224.3 4441.1,275.39 C20.2 4364.54,358.26 4318.82,403.99 4318.82,558.37 4336.12,575.68 R18.2@4380.2,575.68
NetC21_1: C21.1 U4.6 | length 240.1
  Top Layer w10: C21.1 U4.6
NetC22_1: C22.1 R21.1 U4.8 | length 431.8
  Top Layer w10: R21.1 4756.06,452.39 4816.1,512.43 C22.1 4816.1,643.52 4768.94,690.68 U4.8
NetC22_2: C22.2 R20.1 U4.7 | length 449
  Top Layer w10: R20.1 4757.05,519.9 C22.2 4757.05,639.25 4718.94,677.36 U4.7
NetC24_2: C24.2 J12.4 Q4.3 R22.2 U5.3 | length 1270.2
  Top Layer w10: Q4.3 3692.76,902.16 3735.65,859.26 U5.3 3735.65,744.97 R22.2 3536.36,588.87 3499.61,552.12 3499.61,398.53 3531.21,366.93 C24.2 3598.06,361.02 3500,262.96 J12.4
NetC25_1: C25.1 U5.6 | length 247
  Top Layer w10: C25.1 3859.21,644.83 3885.65,671.26 U5.6
NetC26_1: C26.1 R25.1 U5.8 | length 441.4
  Top Layer w10: R25.1 3955.2,403.76 3950.05,408.91 3950.05,454.33 4015.43,519.72 C26.1 4015.43,657.82 3985.65,687.6 U5.8
NetC26_2: C26.2 R24.1 U5.7 | length 480.4
  Top Layer w10: R24.1 3853.17,403.76 3956.14,506.72 3956.14,560.51 C26.2 3956.38,643.5 3936.33,663.55 3936.33,796.07 U5.7
NetD1_A: D1.A R14.1 | length 135.6
  Top Layer w10: D1.A@213.92,1001.39 R14.1@348.88,1001.39
  Top Layer w20: D1.A D1.A@213.92,1001.39 ; R14.1@348.88,1001.39 R14.1
NetD2_A: D2.A R26.1 | length 151.6
  Top Layer w10: R26.1 D2.A
NetD6_1: D6.1 J10.2 Q2.3 | length 558.3
  Top Layer w10: Q2.3 4117.57,1860.2 4146.04,1888.66 4218.92,1888.66 D6.1 4218.92,1906.01 4236.27,1888.66 4388.83,1888.66 4512.79,2012.63 J10.2
NetJ11_1: J11.1 R21.2 | length 246.9
  Top Layer w10: J11.1 4690,181.71 4756.06,247.77 R21.2
NetJ11_2: J11.2 R20.2 | length 243
  Top Layer w10: J11.2 4590,193.8 4646.51,250.31 R20.2
NetJ12_1: J12.1 R25.2 | length 275.4
  Top Layer w10: J12.1 3800,152.5 3948.31,300.81 R25.2
NetJ12_2: J12.2 R24.2 | length 262.5
  Top Layer w10: J12.2 3700,152.89 3817.1,269.99 R24.2
NetQ1_2: Q1.2 R10.2 | length 89.2
  Top Layer w10: R10.2 2389.02,1420.98 2391.93,1423.9 Q1.2
NetQ2_2: Q2.2 R16.1 | length 107.3
  Top Layer w10: Q2.2 3964.6,1722.41 R16.1
NetQ3_2: Q3.2 U4.2 | length 320.9
  Top Layer w10: Q3.2 4295.93,846.49 4339.87,890.42 4440.04,890.42 4468.94,861.52 U4.2
NetQ4_2: Q4.2 U5.2 | length 354.6
  Top Layer w10: Q4.2 3508.52,776.17 Q4.2@3508.8,776.45 ; Q4.2@3508.8,774.21 Q4.2@3508.8,776.45 ; Q4.2@3518.37,786.02 Q4.2@3508.8,776.45 ; U5.2 3685.65,856.72 3662.85,879.52 3544.24,879.52 3508.8,844.09 Q4.2@3508.8,776.45
NetQ5_4: Q5.4 R27.2 R28.1 | length 283.7
  Top Layer w10: Q5.4 1560.55,834.16 1582,855.61 1582,923.41 R28.1 R27.2
NetQ6_2: Q6.2 R29.1 | length 103.1
  Top Layer w10: R29.1 2772.54,425.94 Q6.2
NetR3_2: R3.2 U3.1 | length 629.4
  Top Layer w10: R3.2 2540,1031.41 2640.66,1132.07 2859.55,1132.07 2961.73,1234.25 U3.1
NetR6_2: R6.2 U3.9 | length 265.4
  Top Layer w10: U3.9 3119.21,1192.87 3225.2,1086.89 R6.2
NetR7_1: R7.1 U3.20 | length 391
  Top Layer w10: U3.20 3505.08,1489.53 3534.99,1459.62 R7.1
NetR18_1: R18.1 R19.1 U4.4 | length 398.6
  Top Layer w10: R18.1 4389.7,500.87 4459.98,571.15 4494.01,571.15 R19.1 4568.94,646.08 U4.4
NetR22_1: R22.1 R23.1 U5.4 | length 395.3
  Top Layer w10: R22.1 3590.7,514.07 3665.5,588.87 R23.1 3700.84,588.87 3785.65,673.69 U5.4
NRST: C10.2 R1.1 S1.1 U3.7 | length 3255.9
  Top Layer w10: R1.1@484.65,1790.72 R1.1 534.06,1791.56 546.37,1803.88 546.37,1846.33 562.24,1862.2 C10.2 ; S1.1 600.1,1863.55 C10.2 ; v1(3025.71,1717.49) 3003.58,1739.62 776.95,1739.62 654.37,1862.2 C10.2 ; v1(3045.39,1406.34) 3044.61,1405.56 3044.61,1379.11 3079.84,1343.88 U3.7
  Bottom Layer w10: v1(3025.71,1717.49) 3045.39,1697.8 v1(3045.39,1406.34)
SCL: P3.4 R8.2 U3.42 | length 1140.5
  Top Layer w10: P3.4 2043.98,1022.95 2326.5,1305.47 R8.2 2390.91,1343.04 2407.48,1359.6 2627.41,1359.6 2737.65,1469.84 U3.42
SDA: P3.3 R9.2 U3.43 | length 1134.2
  Top Layer w10: P3.3 2156.41,857.09 2465.72,1166.39 R9.2 2510.35,1202.22 2758.28,1450.16 U3.43
TEMP_ADC: C13.2 J4.1 R4.2 U3.11 | length 1617.8
  Top Layer w10: J4.1 2497.33,117.67 C13.2 2509.94,311.67 R4.2 2626.87,396.31 2911.57,681.01 2911.57,857.49 v1(2967.64,913.55) ; v1(3158.58,1203.68) U3.11
  Bottom Layer w10: v1(2967.64,913.55) 3117.43,913.55 3158.58,954.7 v1(3158.58,1203.68)
USART_RX: J2.1 U3.31 | length 2387.3
  Top Layer w10: J2.1 1097.35,1871.47 1182.94,1785.88 2511.53,1785.88 2564.21,1838.56 2995.22,1838.56 3060.16,1773.62 U3.31
USART_TX: J2.2 U3.30 | length 2207.5
  Top Layer w10: J2.2 1197.35,1986.42 1229.78,1953.99 1999.6,1953.99 2091.97,1861.62 3011.53,1861.62 3079.84,1793.3 U3.30
Weight1_Dout: U3.19 U4.12 | length 1696.7
  Top Layer w10: U3.19 3478.97,1469.84 3735.68,1213.13 v1(4555.7,1213.13) ; U4.12 4627.78,1010.32 4618.94,1019.17 v1(4618.94,1129.02)
  Bottom Layer w10: v1(4555.7,1213.13) 4586.27,1213.13 4618.94,1180.47 v1(4618.94,1129.02)
Weight1_SCK: U3.18 U4.11 | length 1709.5
  Top Layer w10: U3.18 3461.84,1450.16 3729.55,1182.45 4629.98,1182.45 4668.94,1143.49 U4.11
Weight2_Dout: U3.33 U5.12 | length 1180.8
  Top Layer w10: U3.33 3020.79,1528.9 v1(3079.84,1469.84) ; v1(3325.25,1267.09) 3556.38,1267.09 3685.02,1138.45 3797.55,1138.45 3835.65,1100.34 U5.12
  Bottom Layer w10: v1(3079.84,1469.84) 3282.6,1267.09 v1(3325.25,1267.09)
Weight2_SCK: U3.32 U5.11 | length 1205
  Top Layer w10: U3.32 3040.47,1564.84 v1(3135.47,1469.84) ; v1(3298.64,1306.67) 3563.17,1306.67 3708.51,1161.33 3850.11,1161.33 3885.65,1125.79 U5.11
  Bottom Layer w10: v1(3135.47,1469.84) v1(3298.64,1306.67)
pads on no net: J9. J9.1 J9.2 J9.3 J9.4 J9.5 J9.6 J9.15 J9.16 P4.3 S2. U3.2 U3.10 U3.12 U3.13 U3.14 U3.15 U3.16 U3.27 U3.37 U3.45 U4.9 U4.10 U4.13 U5.9 U5.10 U5.13 Y1. Y2.

## Polygon pours and split planes (outlines as drawn)
GND on Bottom Layer "Bottom Layer-No Net" (solid, remove dead copper, pour order 16): 5118.11,39.37 5118.11,2125.98 ccw(c5078.74,2125.98) 5078.74,2165.35 39.37,2165.35 ccw(c39.37,2125.98) 0,2125.98 0,39.37 ccw(c39.37,39.37) 39.37,0 5078.74,0 ccw(c5078.74,39.37)
GND on Top Layer "Top Layer-No Net" (solid, remove dead copper, pour order 17): 5118.11,39.37 5118.11,2125.98 ccw(c5078.74,2125.98) 5078.74,2165.35 39.37,2165.35 ccw(c39.37,2125.98) 0,2125.98 0,39.37 ccw(c39.37,39.37) 39.37,0 5078.74,0 ccw(c5078.74,39.37)

## Keep-outs
Keep-Out Layer:
  lines w10: 39.37,7.87 5078.74,7.87 5078.74,2157.48 39.37,2157.48 39.37,7.87

## Other copper
Top Layer:
  region net GND: 1598.67,818.62 1722.51,818.62 1722.51,651.72 1232.79,651.72 1232.79,705.83 1598.67,705.83
  region net HEATER: 1531.33,628.34 1727.75,628.34 1727.75,532.8 1726.92,531.97 1630.32,531.97 1630.32,159.03 1630.32,173.81 1666.38,137.75 1666.38,81.3 1583.19,81.3 1531.33,133.16
  region net 12V: 302.76,486.11 1085.65,486.11 1085.76,365.89 773.77,365.89 704.29,307.44 704.29,135.65 749.87,59.72 1020.62,59.72 1678.26,59.72 1693.33,74.79 1693.33,428.48 1792.52,428.48 1792.52,85.09 1732.95,25.52 651.84,25.52 607.36,103.94 607.36,338.76 580.23,365.89 372.93,365.89 302.76,430.88
Bottom Layer:
  region net GND: 423.81,128.75 423.81,717.62 1011.37,717.62 1011.37,836.08 1265.77,836.08 1265.77,262.79 560.68,262.79 560.68,128.75

## Silkscreen, mask and mechanical layers (free items; w line width, h text height)
Top Overlay:
  text "Tx" at 1162.57,1941.53 h40
  text "Gnd" at 1258.14,1941.53 h40
  text "Rx" at 1053.96,1939.71 h40
  text "Ver 1.1" at 4974.06,1293.86 h60 r90
  text "12V" at 239.38,105.3 h60
  text "FAN" at 3182.47,86.5 h60
  text "HEAT" at 1798.84,86.12 h60
  text "W1" at 4766.09,85.04 h60
  text "TMP" at 2571.58,83.93 h60
  text "W2" at 3877.22,82.26 h60
  text "-      +" at 349.24,21.3 h60
Mechanical 1:
  lines w10: 8.17,-105.16 8.21,-85.16 ; 68.15,-115.28 8.19,-95.16 ; 68.23,-75.28 8.19,-95.16 ; 2216.36,-99.48 8.19,-95.16 ; 2918.14,-100.85 5126.3,-105.16 ; 5066.27,-125.05 5126.3,-105.16 ; 5066.34,-85.05 5126.3,-105.16 ; 5126.28,-115.16 5126.32,-95.16 ; 5168.11,60 5188.11,0 ; 5168.11,2105.35 5188.11,2165.35 ; 5178.11,0 5198.11,0 ; 5178.11,2165.35 5198.11,2165.35 ; 5188.11,691.8 5188.11,0 ; 5188.11,1473.56 5188.11,2165.35 ; 5208.11,60 5188.11,0 ; 5208.11,2105.35 5188.11,2165.35 ; 0,39.37 ccw(c39.37,39.37) 39.37,0 5078.74,0 ccw(c5078.74,39.37) 5118.11,39.37 5118.11,2125.98 ccw(c5078.74,2125.98) 5078.74,2165.35 39.37,2165.35 ccw(c39.37,2125.98) 0,2125.98 0,39.37 ; 5118.11,137.8 5118.11,137.8
  text "2165.354 (mil)" at 5224.1,701.8 h60 r90
  text "5118.12 (mil)" at 2226.29,-135.49 h60 r359.89

## Text inside footprints (layer, text, board x,y; h text height)
J9: Bottom Overlay "128x64" at 2574.61,1127.99 h196.85 r180